# Altium PCB PMSM_G474.PcbDoc (part 2 of 2)
Units mm, origin at the board's own origin, x right, y up, seen from the top; angles counter-clockwise.
Board outline 50 x 80 mm, 4 copper layers (Top Layer, GND, VCC, Bottom Layer), stack 0.603 mm thick; 172 components, 95 nets, 535 pads, 281 vias.
Unrouted connection lines stored in the file: 270.
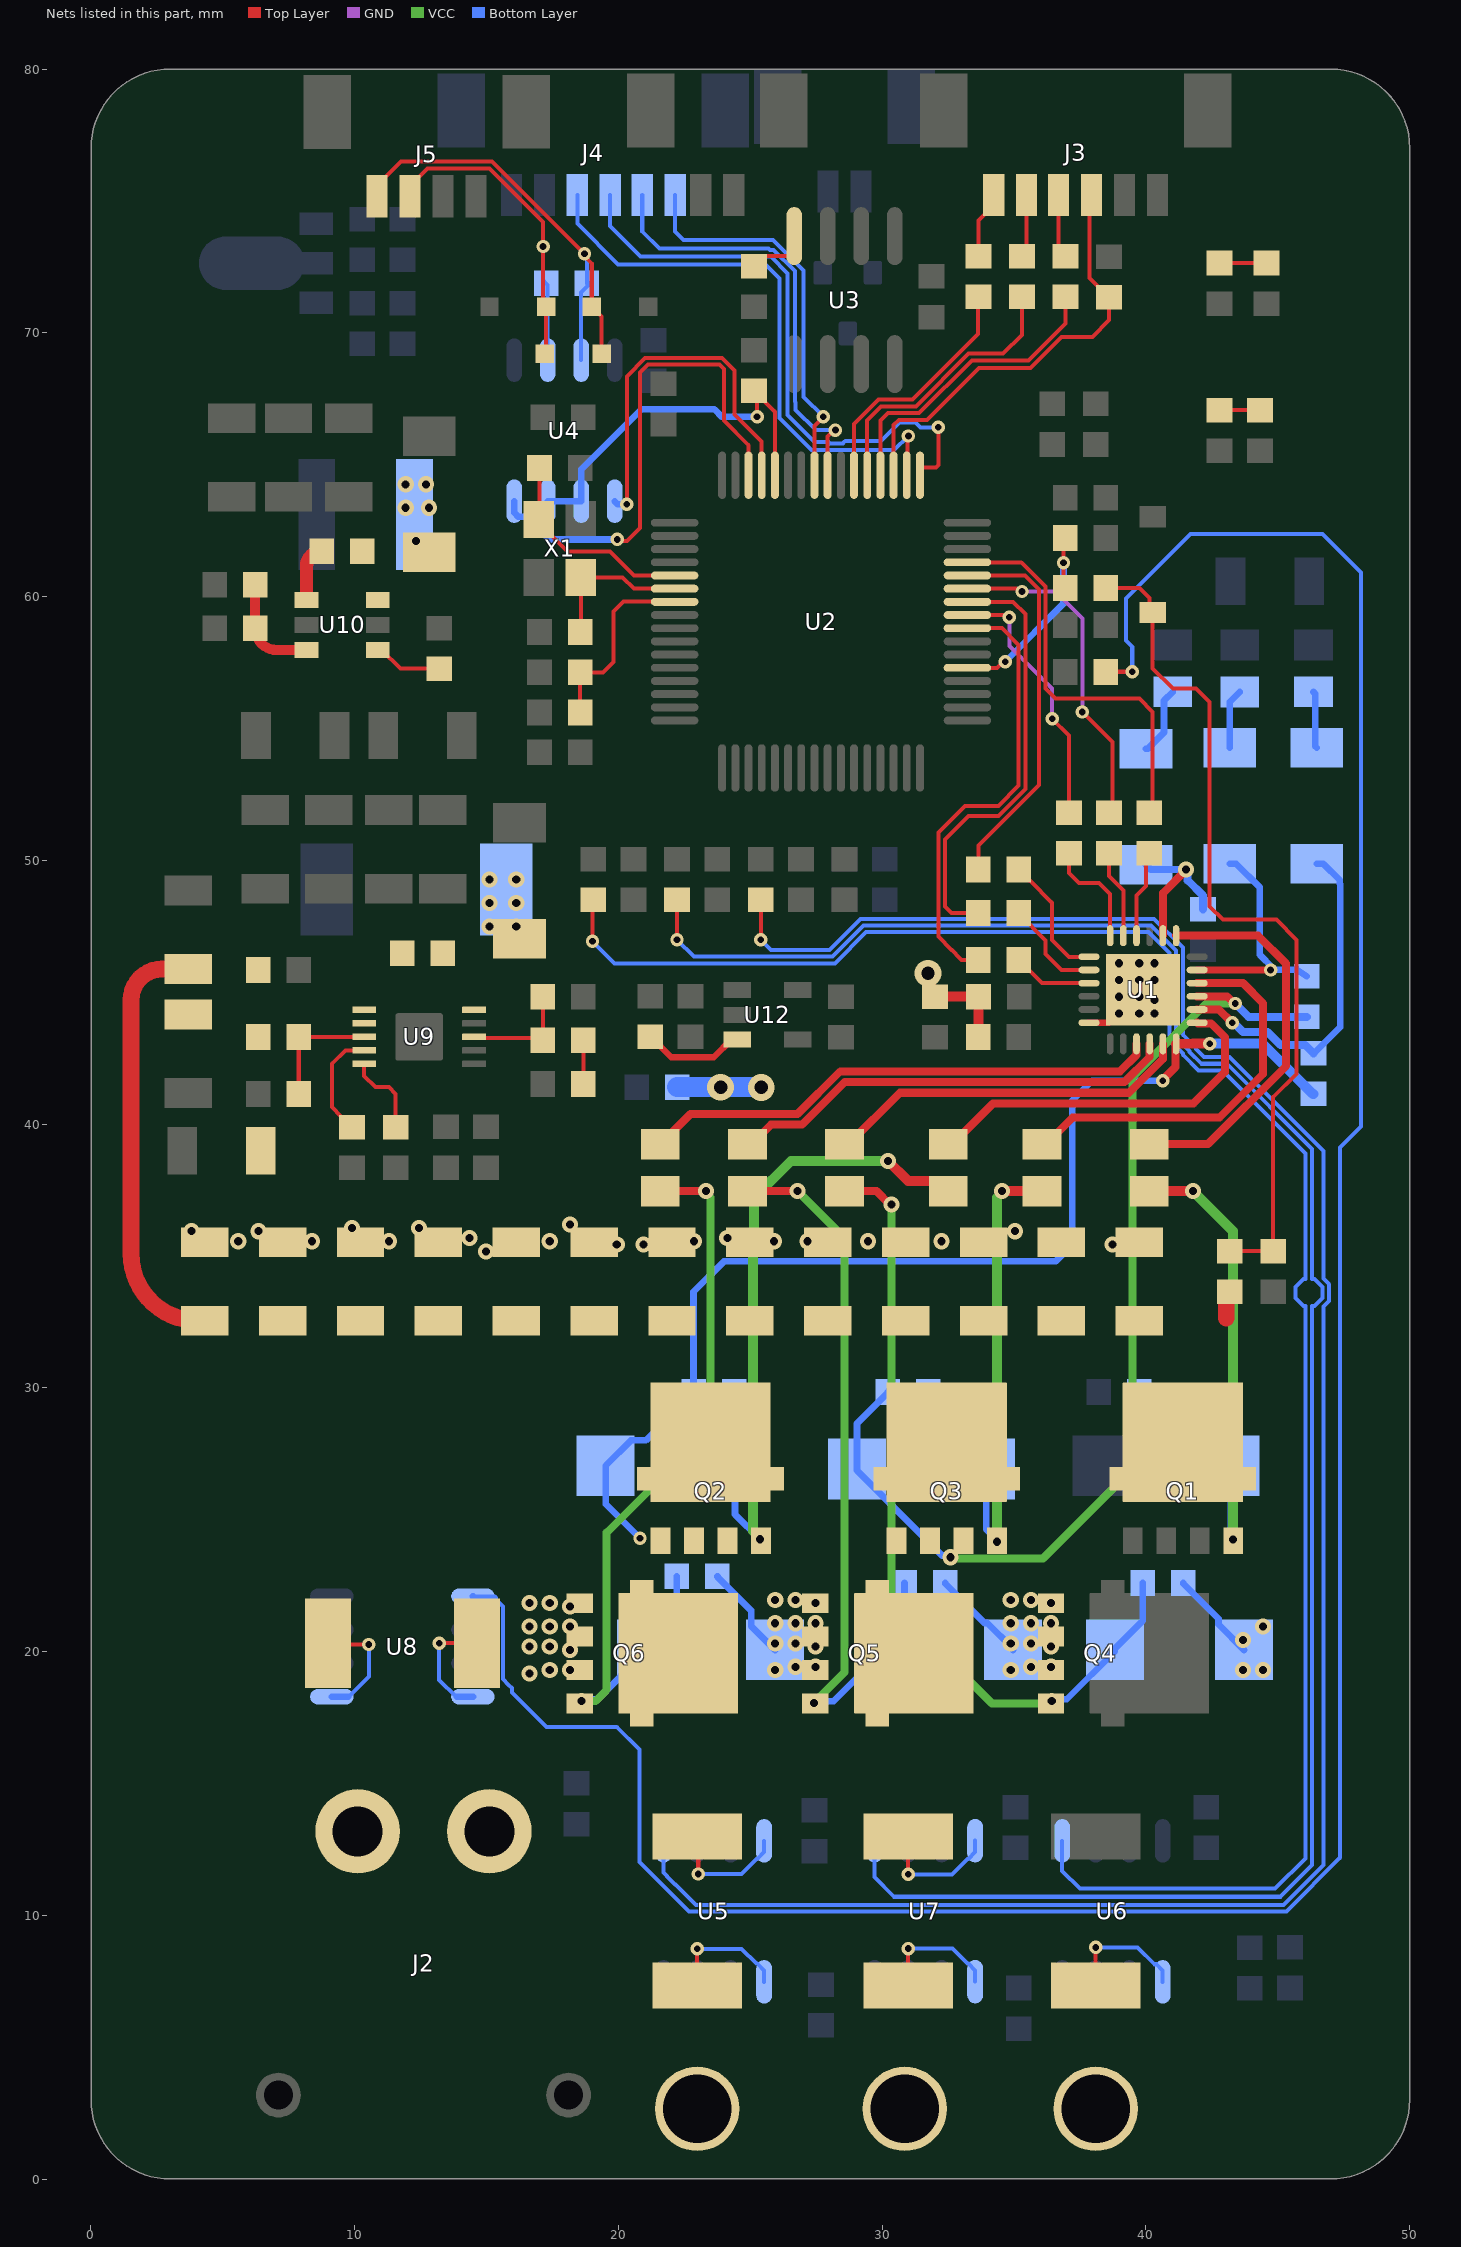
[diagram p4: the nets of this part, all layers, seen from the top]

## Via types
v1: diameter 0.508, hole 0.254, Top Layer to Bottom Layer, 141 vias
v2: diameter 0.61, hole 0.305, Top Layer to Bottom Layer, 128 vias
v3: diameter 1.016, hole 0.508, Top Layer to Bottom Layer, 11 vias
v4: diameter 1, hole 0.5, Top Layer to Bottom Layer, 1 vias

## Nets (pads, with @x,y where several pads share a name; then routed paths per layer and width w, separated by ;. In a path a pad name is that pad's centre, name@x,y a point inside that pad or via, vN(x,y) a via of type N, cw(c..) or ccw(c..) an arc to the next point about the centre after c; other vN are vias at no path point) (continued)
MV_OUT: C12.2 D15.2 Q3.1 Q5.5 R10.2 R24.1 U1.15 U7.8 | length 45.9
  Top Layer w0.152: v1(30.988,11.557) R24.1@30.988,12.985
  Top Layer w0.305: U1.15@41.946,44.847 43.082,44.847 43.352,44.577 v1@43.434,44.577
  VCC w0.305: v2(32.591,23.579) 32.638,23.532 36.105,23.532 39.497,26.924 39.497,41.783 42.291,44.577 v1@43.434,44.577
  Bottom Layer w0.152: v1(30.988,11.557) 32.654,11.557 33.24,12.143 33.267,12.143 33.528,12.404 U7.8@33.528,12.835
  Bottom Layer w0.254: R10.2@30.218,29.845 30.218,29.82 29.046,28.648 D15.2@29.046,26.924 29.046,26.874 32.273,23.647 32.523,23.647 v2(32.591,23.579)
  Bottom Layer w0.305: v1(43.393,44.577) 43.901,44.069 C12.2@46.101,44.069
MW_OUT: C13.2 D16.2 Q2.1 Q6.5 R11.2 R23.1 U1.12 U5.8 | length 48
  Top Layer w0.152: R23.1@22.987,12.731 23.029,12.689 v1(23.029,11.57)
  Top Layer w0.305: v1(40.645,41.651) 40.645,41.69 41.128,42.174 41.128,43.029 U1.12@41.146,43.047
  Top Layer w0.381: U1.12@41.146,43.047 41.783,43.053 v1(42.418,43.053)
  Bottom Layer w0.152: v1(23.029,11.57) 24.674,11.57 25.239,12.135 25.266,12.135 25.527,12.396 U5.8@25.527,12.827
  Bottom Layer w0.254: v1(20.821,24.299) 19.521,25.599 D16.2@19.521,27.051 20.481,28.011 21.042,28.011 22.852,29.82 22.852,33.647 24.003,34.798 36.576,34.798 37.211,35.433 37.211,40.894 37.968,41.651 v1(40.645,41.651)
  Bottom Layer w0.381: v1(42.418,43.053) 44.425,43.053 46.33,41.148 C13.2@46.355,41.148
NetC11_1: C11.1 D8.2 U1.20 | length 6.3
  Top Layer w0.305: U1.20@40.646,47.147 40.646,48.758 41.529,49.641 v2(41.529,49.657)
  Bottom Layer w0.254: D8.2@40.005,49.83 40.178,49.657 v2(41.529,49.657)
  Bottom Layer w0.305: v2(41.529,49.657) 41.587,49.599 41.587,49.247 42.164,48.67 ; C11.1@42.164,48.149 42.164,48.67 ; 42.164,48.67 42.166,48.668 42.17,48.668 42.164,48.674 42.164,48.67
NetC12_1: C12.1 D9.2 U1.17 | length 9.1
  Top Layer w0.254: U1.17@41.946,45.847 v1(44.729,45.847)
  Bottom Layer w0.254: D9.2@43.18,49.871 43.43,49.871 44.323,48.978 44.323,46.421 v1@44.813,45.931 ; v1(44.729,45.847) v1@44.813,45.931 ; C12.1@46.101,45.609 45.738,45.858 45.369,45.858 45.128,45.858 44.886,45.858 v1@44.813,45.931
NetC13_1: C13.1 D10.2 U1.14 | length 13.2
  Top Layer w0.305: U1.14@41.946,44.347 42.767,44.347 43.266,43.849 v1(43.275,43.849)
  Bottom Layer w0.254: C13.1@46.38,42.688 47.371,43.679 47.371,49.099 47.355,49.115 47.355,49.248 46.732,49.871 D10.2@46.482,49.871
  Bottom Layer w0.305: v1(43.275,43.849) 43.33,43.849 43.681,43.497 44.609,43.497 45.106,43.001 46.042,43.001 C13.1@46.355,42.688
NetC27_1: C27.1 U9.1
NetC27_2: C27.2 D11.2 L1.1 U9.10
  other v2: 15.113,47.498 16.129,47.498 15.113,48.387 16.129,48.387 15.113,49.276 16.129,49.276
NetC28_1: C28.1 U9.4 | length 4.2
  Top Layer w0.152: C28.1@9.906,39.886 9.881,39.886 9.492,40.275 9.492,40.3 9.144,40.648 9.144,42.291 9.648,42.795 U9.4@10.363,42.795
NetC37_1: C37.1 R43.2 U9.8 | length 4.3
  Top Layer w0.152: U9.8@14.529,43.307 14.903,43.258 16.748,43.258 R43.2@17.137,43.18 C37.1@17.137,44.831
NetC38_1: C38.1 R43.1 | length 1.7
  Top Layer w0.152: C38.1@18.677,41.529 18.677,41.943 18.677,42.766 R43.1@18.677,43.18
NetC39_1: C39.1 U10.1 | length 2.2
  Top Layer w0.508: U10.1@8.175,59.878 8.175,61.142 cw(c8.755,61.142) C39.1@8.755,61.722
NetC39_2: C39.2 D12.2 L2.1 U10.6
  other v2: 12.319,62.103 11.938,63.373 12.827,63.373 11.938,64.262 12.7,64.262
NetC50_1: C50.1 R48.2 U2.7 | length 7.3
  Top Layer w0.152: R48.2@18.55,55.61 C50.1@18.55,57.134 19.415,57.134 19.812,57.531 19.812,59.436 20.193,59.817 22.124,59.817 U2.7@22.136,59.805
NetD1_1: D1.1 R26.1 | length 1.8
  Top Layer w0.152: D1.1@42.799,72.652 R26.1@44.577,72.652
NetD2_2: D2.2 R15.1 R16.2 R21.1 | length 32.6
  Top Layer w0.152: R21.1@38.489,60.325 39.751,60.325 40.132,59.944 40.132,59.525 D2.2@40.259,59.398 40.259,57.277 41.021,56.515 41.91,56.515 42.418,56.007 42.418,48.26 42.926,47.752 44.958,47.752 45.72,46.99 45.72,41.91 44.831,41.021 R16.2@44.831,35.187 R15.1@43.18,35.187
NetD3_1: D3.1 R28.1 | length 1.5
  Top Layer w0.152: D3.1@42.799,67.072 R28.1@44.323,67.072
NetD8_1: D8.1 R36.1 | length 2.6
  Bottom Layer w0.254: D8.1@40.005,54.23 40.067,54.23 40.69,54.853 40.69,56.057 R36.1@41.021,56.388
NetD9_1: D9.1 R37.1 | length 2.3
  Bottom Layer w0.254: D9.1@43.18,54.271 43.18,56.006 R37.1@43.561,56.387
NetD10_1: D10.1 R38.1 | length 2.2
  Bottom Layer w0.254: R38.1@46.355,56.389 46.419,56.326 46.419,54.335 D10.1@46.482,54.271
NetJ3_4: J3.4 R56.1 | length 2.4
  Top Layer w0.152: J3.4@36.696,75.234 36.696,73.167 R56.1@36.957,72.906
NetJ3_5: J3.5 R57.1 | length 2.4
  Top Layer w0.152: R57.1@35.306,72.906 35.482,73.082 J3.5@35.482,75.234
NetJ3_6: J3.6 R58.1 | length 2.6
  Top Layer w0.152: R58.1@33.655,72.906 33.655,74.257 34.232,74.834 J3.6@34.232,75.234
NetR1_1: R1.1 U1.1 | length 4.9
  Top Layer w0.152: R1.1@35.187,49.657 35.187,49.632 35.576,49.243 35.601,49.243 36.449,48.395 36.449,46.99 37.092,46.347 U1.1@37.846,46.347
NetR2_1: R2.1 U1.2 | length 3.9
  Top Layer w0.152: R2.1@35.187,48.006 35.187,47.981 36.195,46.973 36.195,46.458 36.806,45.847 U1.2@37.846,45.847
NetR3_1: R3.1 U1.3 | length 3
  Top Layer w0.152: R3.1@35.187,46.228 35.187,46.203 35.576,45.814 35.601,45.814 36.068,45.347 U1.3@37.846,45.347
NetR4_1: R4.1 U1.22 | length 3.3
  Top Layer w0.152: U1.22@39.646,47.147 39.646,48.663 40.005,49.022 40.005,50.149 R4.1@40.132,50.276
NetR6_1: R6.1 U1.23 | length 3.4
  Top Layer w0.152: R6.1@38.608,50.276 38.608,49.403 39.146,48.865 U1.23@39.146,47.147
NetR7_1: R7.1 U1.13 | length 14.2
  Top Layer w0.305: R7.1@32.512,39.244 32.667,39.244 34.208,40.785 41.801,40.785 43.002,41.986 43.002,43.295 42.478,43.82 41.973,43.82 U1.13@41.946,43.847
NetR8_1: R8.1 U1.24 | length 4.2
  Top Layer w0.152: R8.1@37.084,50.276 37.084,49.53 37.465,49.149 38.227,49.149 38.646,48.73 U1.24@38.646,47.147
NetR18_2: R18.2 U5.5 | length 83.7
  Top Layer w0.152: R18.2@25.399,48.506 25.4,48.505 v1(25.4,46.99)
  Bottom Layer w0.152: U5.5@21.717,12.827 21.717,11.621 21.844,11.494 21.844,11.468 22.142,11.17 22.168,11.17 22.936,10.402 45.228,10.402 46.736,11.91 46.736,33.087 46.948,33.299 46.948,33.931 46.736,34.143 46.736,38.989 43.18,42.545 42.208,42.545 41.91,42.843 41.91,42.882 41.402,43.39 41.402,46.318 41.402,46.692 40.307,47.787 39.933,47.787 29.183,47.787 28.005,46.609 25.781,46.609 v1(25.4,46.99)
NetR19_2: R19.2 U6.5 | length 73.1
  Top Layer w0.152: v1(19.018,46.93) 19.018,48.474 R19.2@19.05,48.506
  Bottom Layer w0.152: v1(19.018,46.93) 19.847,46.101 28.216,46.101 29.394,47.279 40.097,47.279 40.894,46.482 40.894,43.18 41.402,42.672 41.402,42.632 41.997,42.037 42.898,42.037 45.803,39.132 46.05,38.884 46.05,34.123 45.976,34.123 45.679,33.825 45.679,33.405 45.976,33.107 46.05,33.107 46.05,12.158 44.904,11.011 37.503,11.011 36.83,11.684 U6.5@36.83,12.827
NetR20_2: R20.2 U7.5 | length 78.2
  Top Layer w0.152: v1(22.225,46.99) R20.2@22.225,48.506
  Bottom Layer w0.152: v1(22.225,46.99) 22.86,46.355 28.111,46.355 29.289,47.533 39.828,47.533 40.202,47.533 41.148,46.587 41.148,46.213 41.148,43.285 41.656,42.777 41.656,42.737 42.102,42.291 43.075,42.291 46.304,39.061 46.304,34.123 46.397,34.123 46.694,33.825 46.694,33.405 46.397,33.107 46.304,33.107 46.304,11.909 45.167,10.772 45.102,10.707 38.682,10.707 30.458,10.707 29.718,11.447 U7.5@29.718,12.835
NetR22_2: R22.2 U8.5 | length 106.3
  Top Layer w0.152: R22.2@38.489,57.15 38.493,57.154 v1(39.485,57.154)
  Bottom Layer w0.152: 15.306,22.032 15.621,21.717 15.621,18.964 15.842,18.743 ; 15.843,18.743 15.962,18.624 15.962,18.455 17.272,17.145 19.939,17.145 20.803,16.281 20.803,12.033 22.687,10.148 45.333,10.148 47.371,12.186 47.371,39.116 48.158,39.903 48.158,60.918 46.694,62.382 41.698,62.382 39.243,59.927 39.243,58.337 39.485,58.094 v1(39.485,57.154)
  Bottom Layer w0.254: U8.5@14.486,22.098 14.552,22.032 15.306,22.032
NetR27_1: R27.1 U1.19 | length 14.9
  Top Layer w0.305: R27.1@40.132,39.244 42.359,39.244 45.314,42.199 45.314,46.089 44.256,47.147 U1.19@41.146,47.147
NetR29_1: R29.1 U1.16 | length 15
  Top Layer w0.305: R29.1@36.068,39.244 36.223,39.244 37.224,40.245 42.785,40.245 44.45,41.91 44.45,44.577 43.68,45.347 U1.16@41.946,45.347
NetR31_1: R31.1 U1.11 | length 14
  Top Layer w0.305: R31.1@28.575,39.244 28.73,39.244 30.677,41.191 39.359,41.191 40.646,42.479 U1.11@40.646,43.047
NetR33_1: R33.1 U1.10 | length 17.1
  Top Layer w0.305: R33.1@24.892,39.244 25.047,39.244 25.783,39.98 26.965,39.98 28.584,41.598 39.19,41.598 40.146,42.554 U1.10@40.146,43.047
NetR35_1: R35.1 U1.9 | length 19.9
  Top Layer w0.305: R35.1@21.59,39.244 22.732,40.386 26.797,40.386 28.415,42.004 39.022,42.004 39.646,42.628 U1.9@39.646,43.047
NetR40_1: R40.1 R42.2 U9.3 | length 4.3
  Top Layer w0.152: R42.2@7.882,41.529 R40.1@7.882,43.307 U9.3@10.363,43.307
NetR44_2: R44.2 U9.5 | length 3.2
  Top Layer w0.152: U9.5@10.363,42.283 10.363,41.834 10.795,41.402 11.303,41.402 11.557,41.148 R44.2@11.557,39.886
NetR45_1: R45.1 U10.4 | length 2.6
  Top Layer w0.152: U10.4@10.875,57.978 11.025,57.978 11.734,57.269 R45.1@13.208,57.269
NetR46_1: R46.1 R47.1 U10.3 | length 4.1
  Top Layer w0.381: R46.1@6.231,60.452 R47.1@6.231,58.801 ccw(c7.054,58.801) 7.054,57.978 U10.3@8.175,57.978
NetR50_2: R50.2 U12.3 | length 3.9
  Top Layer w0.254: R50.2@21.209,43.307 21.234,43.307 22.004,42.537 23.618,42.537 24.286,43.205 U12.3@24.511,43.205
NetR51_1: R51.1 U3.8 | length 2.3
  Top Layer w0.152: R51.1@25.146,72.525 25.535,72.914 26.463,72.914 26.67,73.121 U3.8@26.67,73.672
OSC_IN: C51.2 U2.5 X1.1 | length 8.1
  Top Layer w0.152: C51.2@17.01,64.881 17.01,62.963 X1.1@16.98,62.933 16.98,62.808 18.066,61.722 19.685,61.722 20.602,60.805 U2.5@22.136,60.805
OSC_OUT: C52.2 U2.6 X1.3 | length 5.8
  Top Layer w0.152: C52.2@18.55,58.658 18.58,58.688 X1.3@18.58,60.733 20.166,60.733 20.594,60.305 U2.6@22.136,60.305
PGND: C1.2 C14.2 C15.2 C16.2 C17.2 C18.2 C19.2 C20.2 C21.2 C22.2 C23.2 C24.2 C25.2 C26.2 C66.2 C67.2 D17.2 D18.2 D19.2 J2.2 Q4.1 Q5.1 Q6.1 R5.2 R12.2 R13.2 R14.2 U1.6 U1.25 | length 20.8
  Top Layer w0.254: U1.6@37.846,43.847 37.848,43.849 38.598,43.849 39.846,45.097 U1.25@39.896,45.097
  Top Layer w0.381: v3(31.74,45.72) 31.862,45.598 31.862,44.956 31.983,44.835 33.651,44.835 C67.2@33.655,44.831 33.651,44.827 33.651,43.311 C1.2@33.647,43.307
  Top Layer w0.762: v3(25.419,41.392) v3@25.419,41.402
  Bottom Layer w0.254: R14.2@23.757,22.86 23.757,22.835 25.035,21.557 25.035,20.976 D19.2@25.945,20.066 ; R13.2@32.393,22.606 32.393,22.581 33.885,21.089 33.989,21.089 34.962,20.116 D18.2@34.962,20.066 ; R12.2@41.418,22.606 41.418,22.581 42.752,21.247 42.752,21.039 D17.2@43.725,20.066
  Bottom Layer w0.762: R5.2@22.233,41.402 v3(23.876,41.402) 25.419,41.402 v3(25.419,41.392)
  other v2: 16.637,19.177 17.399,19.304 18.161,19.304 25.947,19.299 34.878,19.299 43.688,19.304 44.45,19.304 26.709,19.426 27.471,19.426 35.64,19.426 36.402,19.426 18.161,20.066 16.637,20.193 17.399,20.193 27.471,20.188 36.402,20.188 25.947,20.315 26.709,20.315 34.878,20.315 35.64,20.315 43.688,20.447 16.637,20.955 17.399,20.955 18.161,20.955 44.45,20.955 25.947,21.077 26.709,21.077 27.471,21.077 34.878,21.077 35.64,21.077 36.402,21.077 18.161,21.717 16.637,21.844 17.399,21.844 27.471,21.839 36.402,21.839 25.947,21.966 26.709,21.966 34.878,21.966 35.64,21.966 14.986,35.179 19.939,35.433 20.955,35.433 38.735,35.433 5.588,35.56 8.382,35.56 11.303,35.56 17.399,35.56 22.86,35.56 25.908,35.56 27.178,35.56 29.464,35.56 32.258,35.56 14.351,35.687 24.13,35.687 3.81,35.941 6.35,35.941 35.032,35.941 9.906,36.068 12.446,36.068 18.161,36.195 38.989,44.196 39.751,44.196 40.335,44.196 40.335,44.704 38.989,44.831 39.751,44.831 38.989,45.466 39.751,45.466 40.335,45.466 38.989,46.101 39.751,46.101 40.335,46.101
RS485_A: D20.1 D21.2 J5.3 R53.2 U4.6 | length 15.7
  Top Layer w0.152: J5.3@12.105,75.184 12.105,75.584 12.759,76.238 15.11,76.238 17.145,74.203 v1(17.145,73.279) 17.145,71.112 D21.2@17.264,70.993 17.264,69.545 D20.1@17.34,69.469
  Bottom Layer w0.152: v1(17.145,73.279) 17.145,72.001 R53.2@17.264,71.882 ; U4.6@17.321,68.969 R53.2@17.321,71.812
RS485_B: D20.2 D22.2 J5.4 R53.1 U4.7 | length 18.4
  Top Layer w0.152: J5.4@10.855,75.184 10.855,75.584 11.763,76.492 15.215,76.492 18.7,73.007 v1(18.716,73.007) 18.716,72.911 18.991,72.636 D22.2@18.991,70.993 19.363,70.621 D20.2@19.363,69.215
  Bottom Layer w0.152: U4.7@18.591,68.969 18.591,71.542 R53.1@18.931,71.882 ; v1(18.716,73.007) 18.716,72.939 18.804,72.851 R53.1@18.804,71.882
RS485_EN: R49.2 U2.60 U4.2 U4.3 | length 14.8
  Top Layer w0.152: R49.2@25.146,67.802 R49.2@25.171,67.802 ; v1(25.261,66.817) 25.261,67.712 R49.2@25.171,67.802 ; U2.60@25.936,64.605 25.936,67.012 25.56,67.388 25.56,67.413 R49.2@25.171,67.802
  Bottom Layer w0.254: U4.3@17.321,63.619 U4.2@18.591,63.619 18.591,64.819 20.879,67.107 23.638,67.107 23.928,66.817 v1(25.261,66.817)
RS485_RX: U2.61 U4.1 | length 14.3
  Top Layer w0.152: v1(20.32,63.5) 20.32,68.356 21.017,69.053 23.933,69.053 24.402,68.584 24.402,66.911 25.436,65.877 U2.61@25.436,64.605
  Bottom Layer w0.254: U4.1@19.861,63.619 19.98,63.5 v1(20.32,63.5)
RS485_TX: U2.62 U4.4 | length 19.5
  Top Layer w0.152: v1(19.959,62.171) 20.026,62.103 20.32,62.103 20.828,62.611 20.828,68.505 21.122,68.799 23.828,68.799 24.003,68.624 24.003,66.675 24.936,65.742 U2.62@24.936,64.605
  Bottom Layer w0.254: U4.4@16.051,63.619 16.051,63.188 16.211,63.028 16.532,63.028 17.389,62.171 v1(19.959,62.171)
SPI_CS: J3.3 R55.1 U2.51 | length 16.8
  Top Layer w0.152: U2.51@30.436,64.605 30.436,66.504 30.638,66.706 31.698,66.706 33.668,68.676 35.634,68.676 36.808,69.85 37.973,69.85 38.608,70.485 R55.1@38.608,71.358 38.583,71.358 37.864,72.077 37.864,75.152 J3.3@37.946,75.234
SPI_MISO: R57.2 U2.53 | length 10.7
  Top Layer w0.152: U2.53@29.436,64.605 29.436,66.685 29.965,67.214 31.278,67.214 33.279,69.215 34.593,69.215 35.306,69.928 R57.2@35.306,71.366
SPI_MOSI: R58.2 U2.54 | length 9.5
  Top Layer w0.152: U2.54@28.936,64.605 28.936,66.544 29.86,67.468 31.146,67.468 33.63,69.952 33.63,71.341 R58.2@33.655,71.366
SPI_SCK: R56.2 U2.52 | length 11.6
  Top Layer w0.152: U2.52@29.936,64.605 29.936,66.677 30.219,66.96 31.4,66.96 33.401,68.961 35.56,68.961 36.957,70.358 R56.2@36.957,71.366
SWCLK: J4.3 U2.50 | length 22
  Top Layer w0.152: U2.50@30.936,64.605 30.964,64.633 30.964,66.06 v1(30.998,66.094)
  Bottom Layer w0.152: J4.3@18.442,75.234 18.442,74.143 19.992,72.593 25.583,72.593 26.111,72.065 26.111,66.769 27.325,65.556 28.762,65.556 30.46,65.556 v1(30.998,66.094)
SWDIO: J4.4 U2.49 | length 23
  Top Layer w0.152: U2.49@31.436,64.605 31.436,64.826 31.504,64.894 31.725,64.894 31.728,64.897 32.042,64.897 32.131,64.986 v1(32.131,66.421)
  Bottom Layer w0.152: J4.4@19.692,75.234 19.692,74.051 20.845,72.898 25.781,72.898 26.416,72.263 26.416,66.887 26.467,66.836 27.442,65.861 27.898,65.861 27.97,65.861 28.021,65.81 28.513,65.81 28.564,65.861 28.615,65.911 29.954,65.911 30.654,66.611 30.726,66.611 31.27,66.611 31.461,66.421 v1(32.131,66.421)
U_OUT: J1.1 R25.2 U6.1 | length 4.9
  Top Layer w0.152: R25.2@38.1,7.208 v1(38.1,8.785)
  Bottom Layer w0.152: v1(38.1,8.785) 39.693,8.785 40.33,8.147 40.401,8.147 40.64,7.908 U6.1@40.64,7.477
UART2_RX: J4.6 U2.57 | length 15.1
  Top Layer w0.152: U2.57@27.436,64.605 27.436,66.478 27.77,66.812 v1(27.77,66.826)
  Bottom Layer w0.152: J4.6@22.156,75.234 22.156,73.855 22.478,73.533 25.864,73.533 25.941,73.457 27.026,72.372 27.026,67.57 v1(27.77,66.826)
UART2_TX: J4.5 U2.56 | length 16.8
  Top Layer w0.152: U2.56@27.936,64.605 27.935,66.066 28.194,66.325 28.201,66.318 v1(28.231,66.318)
  Bottom Layer w0.152: J4.5@20.906,75.234 20.906,73.853 21.556,73.203 22.306,73.203 25.692,73.203 25.717,73.177 25.743,73.152 25.886,73.152 26.695,72.343 26.695,72.271 26.695,67.398 26.721,67.372 26.721,67.085 27.488,66.318 v1(28.231,66.318)
UH_IN: R4.2 U2.45 | length 15.5
  Top Layer w0.152: U2.45@33.236,61.305 35.277,61.305 36.195,60.387 36.195,56.515 36.576,56.134 39.751,56.134 40.259,55.626 40.259,51.943 R4.2@40.132,51.816
UH_OUT: D14.1 Q1.4 R9.1 R27.2 | length 23
  Top Layer w0.381: R27.2@40.132,37.464 R27.2@40.132,37.464 v2(41.783,37.465)
  VCC w0.381: v2(41.783,37.465) 43.307,35.941 v2(43.307,24.257)
  Bottom Layer w0.254: R9.1@39.759,29.845 39.759,29.82 41.568,28.011 42.257,28.011 D14.1@43.217,27.051 43.217,24.443 43.307,24.353 v2(43.307,24.257)
UL_IN: R1.2 U2.44 | length 14.5
  Top Layer w0.152: U2.44@33.236,60.805 35.417,60.805 35.941,60.281 35.941,52.854 33.647,50.56 R1.2@33.647,49.657
UL_OUT: D17.1 Q4.4 R12.1 R31.2 | length 31
  Top Layer w0.305: R31.2@28.575,37.464 R31.2@28.575,37.464 29.783,37.465 30.291,36.957 v2(30.353,36.957)
  VCC w0.305: v2(30.353,36.957) 30.353,21.844 34.163,18.034 36.332,18.034 v2(36.433,18.135)
  Bottom Layer w0.254: v2(36.433,18.135) 36.492,18.193 37.002,18.193 38.825,20.016 38.825,20.116 39.878,21.169 R12.1@39.878,22.606
V_OUT: J8.1 R24.2 U7.1 | length 4.7
  Top Layer w0.152: R24.2@30.988,7.335 v1(30.988,8.742)
  Bottom Layer w0.152: v1(30.988,8.742) 32.675,8.742 33.24,8.177 33.267,8.177 33.528,7.916 U7.1@33.528,7.485
VBAT: J2.1 R17.1 U8.8 | length 4.4
  Top Layer w0.152: v1(13.208,20.32) R17.1@14.636,20.32
  Bottom Layer w0.152: v1(13.208,20.32) 13.208,18.923 U8.8@13.855,18.276
  Bottom Layer w0.254: U8.8@13.867,18.288 U8.8@14.486,18.288
VH_IN: R6.2 U2.43 | length 12.7
  Top Layer w0.152: U2.43@33.236,60.305 35.103,60.305 35.21,60.198 v1(35.306,60.198) ; v1(37.592,55.626) 38.735,54.483 38.735,51.943 R6.2@38.608,51.816
  GND w0.152: v1(35.306,60.198) 36.576,60.198 37.592,59.182 v1(37.592,55.626)
VH_OUT: D15.1 Q3.4 R10.1 R29.2 | length 21.7
  Top Layer w0.381: v2(34.544,37.465) R29.2@36.068,37.464 R29.2@36.068,37.464
  VCC w0.381: v2(34.359,24.167) 34.359,37.218 34.544,37.403 v2(34.544,37.465)
  Bottom Layer w0.254: R10.1@31.758,29.845 31.758,29.82 33.036,28.541 33.036,27.834 D15.1@33.946,26.924 33.946,24.642 34.359,24.229 v2(34.359,24.167)
VIN: C14.1 C15.1 C16.1 C17.1 C18.1 C19.1 C20.1 C21.1 C22.1 C23.1 C24.1 C25.1 C26.1 C29.1 C30.1 C31.1 C32.1 Q1.5 Q2.5 Q3.5 R15.2 R17.2 R40.2 U8.1 U9.2 | length 23.3
  Top Layer w0.152: R17.2@8.986,20.32 9.037,20.269 v1(10.541,20.269)
  Top Layer w0.635: C30.1@3.1,45.634 3.348,45.881 C30.1@3.683,45.881 2.701,45.881 ccw(c2.701,44.704) 1.524,44.704 1.524,35.086 ccw(c4.064,35.086) 4.064,32.546 C14.1@4.318,32.546 C14.1@3.983,32.546 ; 43.053,32.639 43.053,33.52 R15.2@43.18,33.647
  Bottom Layer w0.152: U8.1@9.767,18.276 10.541,19.05 v1(10.541,20.269)
  Bottom Layer w0.254: U8.1@9.136,18.288 U8.1@9.755,18.288
VL_IN: R2.2 U2.42 | length 16.8
  Top Layer w0.152: U2.42@33.236,59.805 34.965,59.805 35.433,59.337 35.433,52.705 34.417,51.689 33.274,51.689 32.385,50.8 32.385,48.26 32.639,48.006 R2.2@33.647,48.006
VL_OUT: D18.1 Q5.4 R13.1 R33.2 | length 28.9
  Top Layer w0.305: R33.2@24.892,37.464 R33.2@24.892,37.464 v2(26.797,37.465)
  VCC w0.305: v2(26.797,37.465) 28.575,35.687 28.575,19.219 v2(27.416,18.06)
  Bottom Layer w0.254: v2(27.416,18.06) 27.474,18.118 28.164,18.118 30.062,20.016 D18.1@30.062,20.066 30.853,20.857 R13.1@30.853,22.606
VOL_SAMP: C8.1 R21.2 U2.37 | length 8.2
  Top Layer w0.152: U2.37@33.236,57.305 34.365,57.305 34.591,57.531 v1(34.671,57.531) ; R21.2@36.949,60.325 36.877,60.397 v1(36.877,61.291) 36.877,62.158 C8.1@36.949,62.23
  Bottom Layer w0.254: v1(34.671,57.531) 36.877,59.737 v1(36.877,61.291)
W_OUT: J9.1 R23.2 U5.1 | length 5
  Top Layer w0.152: R23.2@22.987,7.081 v1(22.987,8.734)
  Bottom Layer w0.152: v1@22.987,8.734 24.674,8.734 25.239,8.169 25.266,8.169 25.527,7.908 U5.1@25.527,7.477
WH_IN: R8.2 U2.41 | length 10
  Top Layer w0.152: U2.41@33.236,59.305 34.65,59.305 34.731,59.224 v1(34.827,59.224) ; v1(36.449,55.372) 37.084,54.737 R8.2@37.084,51.816
  GND w0.152: v1(34.827,59.224) 34.827,58.137 36.449,56.515 v1(36.449,55.372)
WH_OUT: D16.1 Q2.4 R7.2 R11.1 | length 27.5
  Top Layer w0.381: v2(30.226,38.608) 30.98,37.854 32.122,37.854 R7.2@32.512,37.464
  VCC w0.381: v2(25.364,24.262) 25.364,24.324 25.108,24.58 25.108,35.712 25.146,35.75 25.146,37.211 26.543,38.608 v2(30.226,38.608)
  Bottom Layer w0.254: R11.1@24.392,29.845 24.392,27.08 D16.1@24.421,27.051 24.421,25.205 v2(25.364,24.262)
WL_IN: R3.2 U2.40 | length 17.2
  Top Layer w0.152: U2.40@33.236,58.805 34.54,58.805 35.179,58.166 35.179,52.832 34.417,52.07 33.147,52.07 32.131,51.054 32.131,47.117 32.639,46.609 cw(c32.388,46.358) 32.645,46.603 32.959,46.274 33.005,46.228 R3.2@33.647,46.228
WL_OUT: D19.1 Q6.4 R14.1 R35.2 | length 30
  Top Layer w0.305: R35.2@21.59,37.464 R35.2@21.59,37.464 v2(23.33,37.465)
  VCC w0.305: v2(18.607,18.126) 19.142,18.126 19.558,18.542 19.558,24.511 23.495,28.448 23.495,37.217 23.33,37.383 v2(23.33,37.465)
  Bottom Layer w0.254: v2(18.607,18.126) 18.666,18.184 19.213,18.184 21.045,20.016 21.045,20.116 22.217,21.288 R14.1@22.217,22.86
pads on no net: J2.0 J3.0 J4.0 J5.0 J6.0 J7.0 U1.5 U1.7 U1.8 U1.21 U2.2 U2.8 U2.9 U2.10 U2.11 U2.12 U2.13 U2.14 U2.17 U2.18 U2.19 U2.20 U2.21 U2.22 U2.23 U2.30 U2.33 U2.34 U2.35 U2.38 U2.39 U2.46 U2.55 U3.5 U5.4 U6.4 U7.4 U8.4 U9.6 U12.4

## Polygon pours and split planes (outlines as drawn)
VBAT on Top Layer "VBAT_L01_P035" (solid, pour order 35): 13.843,22.098 ccw(c13.843,21.971) 13.716,21.971 13.716,19.177 cw(c13.462,19.177) 13.462,18.923 12.827,18.923 ccw(c12.827,18.669) 12.573,18.669 12.573,13.208 ccw(c15.113,13.208) 15.113,10.668 ccw(c15.113,12.954) 17.399,12.954 17.399,17.526 ccw(c16.764,17.526) 16.764,18.161 16.002,18.161 cw(c16.002,18.669) 15.494,18.669 15.494,21.971 ccw(c15.367,21.971) 15.367,22.098
MU_OUT on Top Layer "MU_OUT_L01_P008" (solid, pour order 8): 38.862,24.765 ccw(c38.862,23.749) 37.846,23.749 37.846,17.145 cw(c37.592,17.145) 37.592,16.891 36.703,16.891 ccw(c36.703,16.51) 36.322,16.51 36.322,12.446 ccw(c36.576,12.446) 36.576,12.192 39.624,12.192 ccw(c39.624,12.319) 39.751,12.319 39.751,13.716 cw(c39.878,13.716) 39.878,13.843 42.164,13.843 ccw(c42.164,14.224) 42.545,14.224 42.545,24.384 ccw(c42.164,24.384) 42.164,24.765
U_OUT on Top Layer "U_OUT_L01_P030" (solid, pour order 30): 36.449,8.255 ccw(c36.449,8.001) 36.195,8.001 36.195,2.032 ccw(c37.338,2.032) 37.338,0.889 38.735,0.889 ccw(c38.735,2.159) 40.005,2.159 40.005,7.747 ccw(c39.497,7.747) 39.497,8.255
V_OUT on Top Layer "V_OUT_L01_P029" (solid, pour order 29): 29.337,8.255 ccw(c29.337,8.001) 29.083,8.001 29.083,2.032 ccw(c30.226,2.032) 30.226,0.889 31.623,0.889 ccw(c31.623,2.159) 32.893,2.159 32.893,7.747 ccw(c32.385,7.747) 32.385,8.255
W_OUT on Top Layer "W_OUT_L01_P028" (solid, pour order 28): 21.336,8.255 ccw(c21.336,8.001) 21.082,8.001 21.082,2.032 ccw(c22.225,2.032) 22.225,0.889 23.622,0.889 ccw(c23.622,2.159) 24.892,2.159 24.892,7.747 ccw(c24.384,7.747) 24.384,8.255
PGND on Top Layer "PGND_L01_P025" (solid, pour order 25): 3.683,36.322 ccw(c3.683,36.068) 3.429,36.068 3.429,35.179 ccw(c3.683,35.179) 3.683,34.925 40.259,34.925 ccw(c40.259,35.306) 40.64,35.306 40.64,36.068 ccw(c40.386,36.068) 40.386,36.322
PGND on Top Layer "PGND_L01_P021" (solid, pour order 21): 37.037,22.347 36.91,22.474 34.497,22.474 ccw(c34.497,22.347) 34.37,22.347 34.37,18.918 ccw(c34.497,18.918) 34.497,18.791 36.91,18.791 ccw(c36.91,19.172) 37.291,19.172 37.291,22.347 ccw(c37.164,22.347) 37.164,22.474
PGND on Top Layer "PGND_L01_P020" (solid, pour order 20): 28.106,22.347 27.979,22.474 25.566,22.474 ccw(c25.566,22.347) 25.439,22.347 25.439,18.918 ccw(c25.566,18.918) 25.566,18.791 27.979,18.791 ccw(c27.979,19.172) 28.36,19.172 28.36,22.347 ccw(c28.233,22.347) 28.233,22.474
PGND on Top Layer "PGND_L01_P019" (solid, pour order 19): 18.796,22.225 18.669,22.352 16.256,22.352 ccw(c16.256,22.225) 16.129,22.225 16.129,18.796 ccw(c16.256,18.796) 16.256,18.669 18.669,18.669 ccw(c18.669,19.05) 19.05,19.05 19.05,22.225 ccw(c18.923,22.225) 18.923,22.352
15V on Top Layer "15V_L01_P012" (solid, pour order 12): 12.065,60.325 ccw(c12.065,60.198) 11.938,60.198 11.938,59.436 cw(c11.811,59.436) 11.811,59.309 10.541,59.309 ccw(c10.541,59.182) 10.414,59.182 10.414,58.801 ccw(c10.541,58.801) 10.541,58.674 12.192,58.674 cw(c12.192,58.547) 12.319,58.547 ccw(c12.573,58.547) 12.573,58.293 13.716,58.293 cw(c13.716,58.166) 13.843,58.166 13.843,56.769 cw(c13.716,56.769) 13.716,56.642 8.89,56.642 ccw(c8.89,56.388) 8.636,56.388 8.636,52.959 cw(c8.382,52.959) 8.382,52.705 5.969,52.705 ccw(c5.969,52.324) 5.588,52.324 5.588,51.308 ccw(c5.715,51.308) 5.715,51.181 7.62,51.181 cw(c7.62,51.054) 7.747,51.054 7.747,49.784 ccw(c7.874,49.784) 7.874,49.657 10.033,49.657 ccw(c10.033,49.784) 10.16,49.784 10.16,51.054 cw(c10.414,51.054) 10.414,51.308 14.097,51.308 ccw(c14.097,51.435) 14.224,51.435 14.224,52.07 ccw(c13.843,52.07) 13.843,52.451 11.938,52.451 cw(c11.938,52.705) 11.684,52.705 11.684,55.245 cw(c12.065,55.245) 12.065,55.626 14.732,55.626 ccw(c14.732,55.88) 14.986,55.88 14.986,59.944 ccw(c14.605,59.944) 14.605,60.325
5V on Top Layer "5V_L01_P015" (solid, pour order 15): 10.668,64.897 ccw(c10.287,64.897) 10.287,65.278 4.953,65.278 ccw(c4.953,64.77) 4.445,64.77 4.445,63.373 ccw(c4.699,63.373) 4.699,63.119 10.414,63.119 ccw(c10.414,63.373) 10.668,63.373
NetC39_2 on Top Layer "NETC39_2_L01_P014" (solid, pour order 14): 11.43,64.77 11.43,62.484 cw(c11.176,62.484) 11.176,62.23 9.906,62.23 ccw(c9.906,62.103) 9.779,62.103 9.779,59.944 ccw(c10.16,59.944) 10.16,59.563 11.176,59.563 ccw(c11.176,59.69) 11.303,59.69 11.303,60.706 cw(c11.557,60.706) 11.557,60.96 13.208,60.96 ccw(c13.208,61.595) 13.843,61.595 13.843,64.643 ccw(c13.589,64.643) 13.589,64.897 11.557,64.897 ccw(c11.557,64.77)
VIN on Top Layer "VIN_L01_P011" (solid, pour order 11): 10.541,43.942 cw(c10.541,43.815) 10.668,43.815 10.668,43.819 10.037,43.819 ccw(c10.037,43.688) 9.906,43.688 9.017,43.688 cw(c9.017,43.815) 8.89,43.815 ccw(c8.636,43.815) 8.636,44.069 7.112,44.069 ccw(c7.112,43.815) 6.858,43.815 6.858,42.926 cw(c6.731,42.926) 6.731,42.799 5.715,42.799 ccw(c5.715,42.672) 5.588,42.672 5.588,40.64 ccw(c5.715,40.64) 5.715,40.513 6.985,40.513 cw(c6.985,40.386) 7.112,40.386 7.112,38.227 cw(c6.858,38.227) 6.858,37.973 5.207,37.973 cw(c5.207,38.1) 5.08,38.1 5.08,43.307 ccw(c4.826,43.307) 4.826,43.561 2.794,43.561 cw(c2.794,43.815) 2.54,43.815 2.54,46.228 cw(c2.794,46.228) 2.794,46.482 6.604,46.482 cw(c6.604,46.228) 6.858,46.228 6.858,45.085 ccw(c6.985,45.085) 6.985,44.958 9.398,44.958 cw(c9.398,44.831) 9.525,44.831 9.525,44.196 ccw(c9.779,44.196) 9.779,43.942
NetC27_1 on Top Layer "NETC27_1_L01_P010" (solid, pour order 10): 10.16,47.117 ccw(c10.16,46.863) 9.906,46.863 9.906,44.45 ccw(c10.033,44.45) 10.033,44.323 10.795,44.323 10.795,45.593 cw(c11.176,45.593) 11.176,45.974 11.938,45.974 ccw(c11.938,46.228) 12.192,46.228 12.192,46.863 ccw(c11.938,46.863) 11.938,47.117
NetC27_2 on Top Layer "NETC27_2_L01_P009" (solid, pour order 9): 15.113,50.038 ccw(c15.113,49.784) 14.859,49.784 14.859,47.498 cw(c14.605,47.498) 14.605,47.244 13.081,47.244 ccw(c13.081,46.99) 12.827,46.99 12.827,46.101 ccw(c13.081,46.101) 13.081,45.847 13.843,45.847 cw(c13.843,45.593) 14.097,45.593 14.097,44.323 ccw(c14.224,44.323) 14.224,44.196 14.859,44.196 ccw(c14.859,44.323) 14.986,44.323 14.986,45.974 cw(c15.24,45.974) 15.24,46.228 17.018,46.228 ccw(c17.018,46.482) 17.272,46.482 17.272,49.657 ccw(c16.891,49.657) 16.891,50.038
MV_OUT on Top Layer "MV_OUT_L01_P007" (solid, pour order 7): 29.21,24.765 ccw(c29.21,24.511) 28.956,24.511 28.956,12.319 ccw(c29.21,12.319) 29.21,12.065 33.274,12.065 ccw(c33.274,12.446) 33.655,12.446 33.655,24.511 ccw(c33.401,24.511) 33.401,24.765
MW_OUT on Top Layer "MW_OUT_L01_P006" (solid, pour order 6): 20.32,24.765 ccw(c20.32,24.384) 19.939,24.384 19.939,12.7 ccw(c20.574,12.7) 20.574,12.065 24.638,12.065 ccw(c24.638,12.319) 24.892,12.319 24.892,21.971 ccw(c24.638,21.971) 24.638,22.225 cw(c24.638,22.352) 24.511,22.352 24.511,24.638 ccw(c24.384,24.638) 24.384,24.765
VIN on Top Layer "VIN_L01_P000" (solid, pour order 0): 9.906,18.669 cw(c9.398,18.669) 9.398,18.161 4.572,18.161 cw(c4.572,20.701) 2.032,20.701 2.032,31.75 cw(c3.429,31.75) 3.429,33.147 42.799,33.147 cw(c42.799,31.877) 44.069,31.877 44.069,26.035 cw(c43.688,26.035) 43.688,25.654 10.922,25.654 ccw(c10.922,24.638) 9.906,24.638
15V on Bottom Layer "15V_L04_P013" (solid, pour order 13): 8.001,52.832 ccw(c8.001,52.578) 7.747,52.578 7.747,47.371 ccw(c8.001,47.371) 8.001,47.117 9.652,47.117 ccw(c9.652,47.371) 9.906,47.371 9.906,52.451 ccw(c9.525,52.451) 9.525,52.832
3V3 on VCC "3V3_L03_P026" (solid, pour order 26): 7.493,77.978 6.985,77.978 ccw(c6.985,77.089) 6.096,77.089 6.096,76.454 cw(c3.556,76.454) 3.556,73.914 2.921,73.914 ccw(c2.921,73.025) 2.032,73.025 2.032,55.499 ccw(c4.572,55.499) 4.572,52.959 45.466,52.959 ccw(c45.466,55.499) 48.006,55.499 48.006,73.025 ccw(c46.99,73.025) 46.99,74.041 46.609,74.041 cw(c46.609,76.581) 44.069,76.581 44.069,76.835 ccw(c42.799,76.835) 42.799,78.105 10.795,78.105
15V on VCC "15V_L03_P017" (solid, pour order 17): 8.128,52.705 7.747,52.324 7.747,50.038 8.001,49.784 9.779,49.784 10.16,50.165 10.16,52.197 9.652,52.705
GND on GND "GND_L02_P034" (solid, pour order 34): 3.635,36.322 cw(c3.635,37.925) 2.032,37.925 2.032,72.898 cw(c3.175,72.898) 3.175,74.041 3.429,74.041 ccw(c3.429,76.581) 5.969,76.581 5.969,76.835 cw(c7.112,76.835) 7.112,77.978 42.545,77.978 cw(c42.545,76.454) 44.069,76.454 ccw(c46.482,76.454) 46.482,74.041 46.99,74.041 cw(c46.99,73.025) 48.006,73.025 48.006,7.493 cw(c46.482,7.493) 46.482,5.969 ccw(c46.482,3.429) 43.942,3.429 43.942,2.921 cw(c43.053,2.921) 43.053,2.032 12.954,2.032 cw(c12.954,2.667) 12.319,2.667 12.319,21.59 cw(c13.335,21.59) 13.335,22.606 15.24,22.606 cw(c15.24,21.844) 16.002,21.844 16.002,19.558 ccw(c16.764,19.558) 16.764,18.796 44.069,18.796 ccw(c44.069,19.558) 44.831,19.558 44.831,24.901 ccw(c44.175,24.901) 44.175,25.557 cw(c44.175,28.076) 41.656,28.076 41.656,44.577 ccw(c39.116,44.577) 39.116,47.117 31.904,47.117 ccw(c31.904,46.201) 30.988,46.201 30.988,43.64 cw(c29.942,43.64) 29.942,42.594 22.453,42.594 ccw(c22.453,41.858) 21.717,41.858 21.717,38.625 cw(c19.426,38.625) 19.426,36.334 4.953,36.334
PGND on GND "PGND_L02_P033" (solid, pour order 33): 44.45,22.479 cw(c44.45,22.098) 44.831,22.098 44.831,19.304 cw(c44.323,19.304) 44.323,18.796 16.256,18.796 cw(c16.256,19.05) 16.002,19.05 16.002,21.844 ccw(c15.24,21.844) 15.24,22.606 13.081,22.606 ccw(c13.081,21.844) 12.319,21.844 12.319,2.667 cw(c11.684,2.667) 11.684,2.032 7.112,2.032 cw(c7.112,3.175) 5.969,3.175 5.969,3.556 ccw(c3.429,3.556) 3.429,6.096 3.048,6.096 cw(c3.048,7.112) 2.032,7.112 2.032,34.544 cw(c3.81,34.544) 3.81,36.322 19.177,36.322 ccw(c19.177,38.862) 21.717,38.862 21.717,41.783 cw(c22.479,41.783) 22.479,42.545 29.591,42.545 ccw(c29.591,43.942) 30.988,43.942 30.988,46.101 cw(c32.004,46.101) 32.004,47.117 39.116,47.117 cw(c39.116,44.577) 41.656,44.577 41.656,27.813 ccw(c43.815,27.813) 43.815,25.654 cw(c43.815,25.019) 44.45,25.019 44.45,22.479

## Silkscreen, mask and mechanical layers (free items; w line width, h text height)
Top Overlay:
  drawing of 18 lines, arcs and shapes, not listed
Mechanical 5:
  circle w0.013: c3.006,77.006 r1.6
  circle w0.013: c47.006,3.006 r1.6
  circle w0.013: c3.006,3.006 r1.6
  circle w0.013: c47.006,77.006 r1.6
  lines w0.013: 0.006,3.006 ccw(c3.006,3.006) 3.006,0.006 47.006,0.006 ccw(c47.006,3.006) 50.006,3.006 50.006,77.006 ccw(c47.006,77.006) 47.006,80.006 3.006,80.006 ccw(c3.006,77.006) 0.006,77.006 0.006,3.006 ; 2.006,7.006 ccw(c3.006,7.006) 3.006,6.006 cw(c3.006,3.006) 6.006,3.006 ccw(c7.006,3.006) 7.006,2.006 43.006,2.006 ccw(c43.006,3.006) 44.006,3.006 cw(c47.006,3.006) 47.006,6.006 ccw(c47.006,7.006) 48.006,7.006 48.006,73.006 ccw(c47.006,73.006) 47.006,74.006 cw(c47.006,77.006) 44.006,77.006 ccw(c43.006,77.006) 43.006,78.006 7.006,78.006 ccw(c7.006,77.006) 6.006,77.006 cw(c3.006,77.006) 3.006,74.006 ccw(c3.006,73.006) 2.006,73.006 2.006,7.006